# EAGLE board e-Bike System (EAGLE 7.7.0)
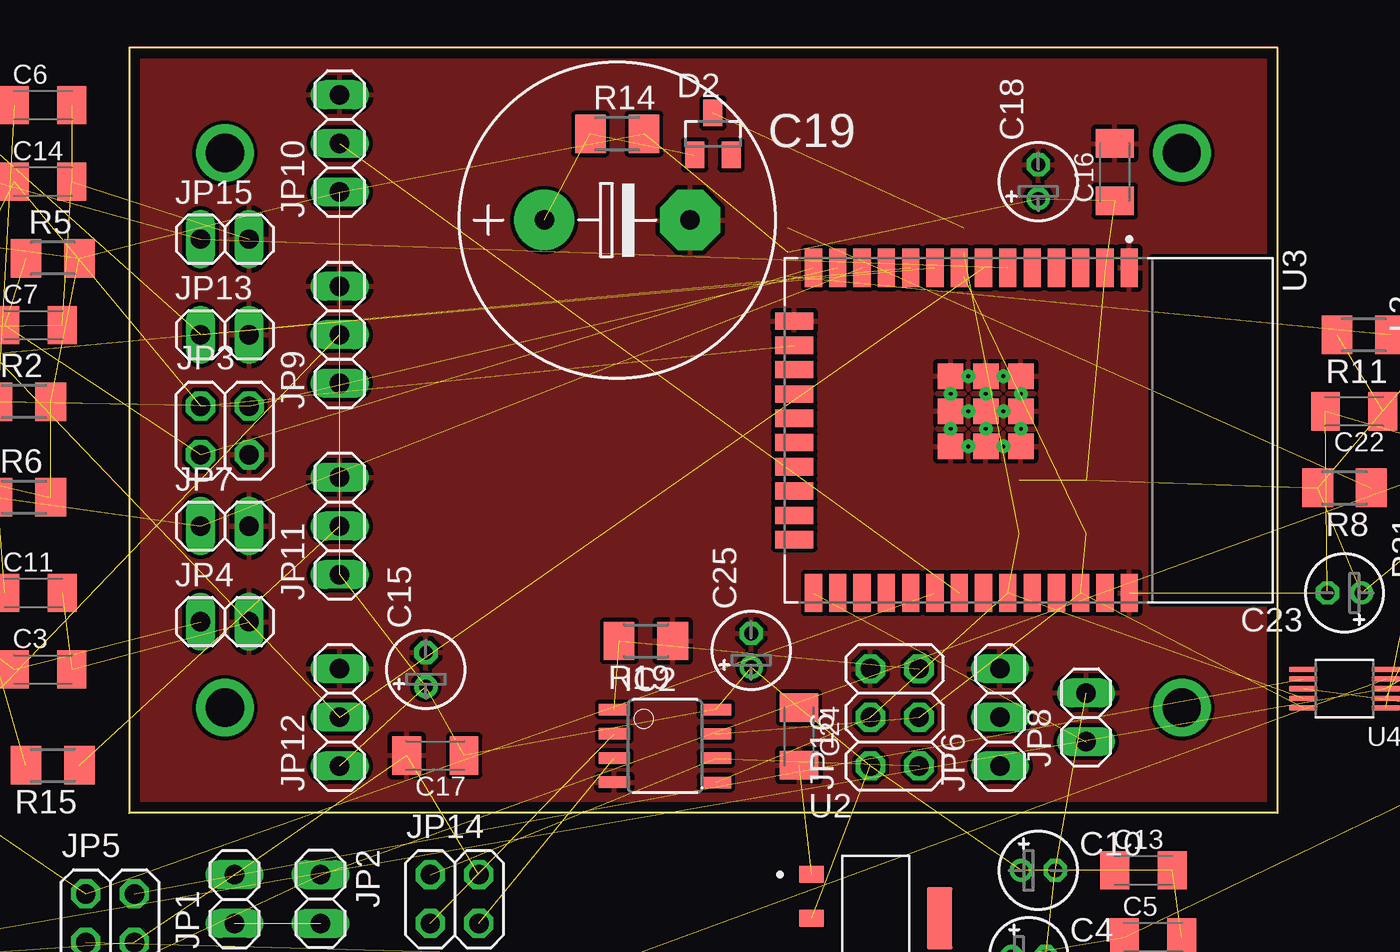
[diagram p0: board, top side]
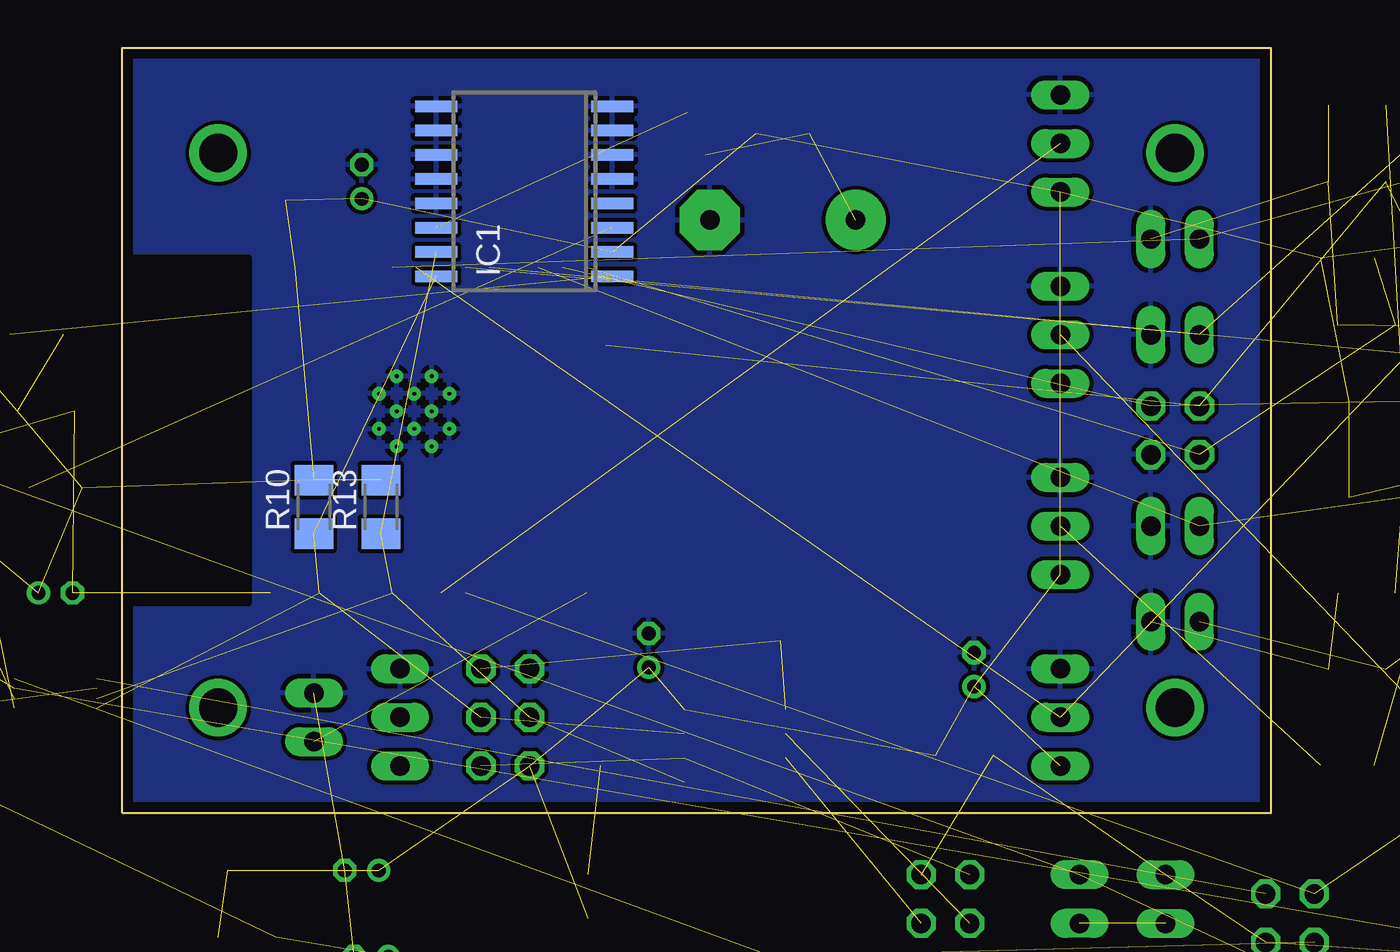
[diagram p1: board, bottom side, seen from below]

Size 60 x 40 mm. Coordinates in mm from the lower left corner, seen from the top.
Outline: 60,0 60,40 0,40 0,0 60,0
Copper layers (1*16): Top 0.035mm / dielectric 1.5mm / Bottom 0.035mm
Design rules "EagleRules": minimum track width 7mil, minimum drill 12mil, track to track 7mil, track to pad 7mil, pad to pad 7mil, via to via 7mil, smd to smd 0mil, copper to edge 20mil, drill to drill 10mil, minimum pad ring 10mil, minimum via ring 6mil, stop-mask expansion 2mil, vias tented up to drill 25mil, thermal gap 10mil

## Footprints (pad centres in the part's own frame; a part is rotated, then mirrored left to right if it is on the bottom)
E1,8-4 = drill 0.711 pad 1.168: + -0.889,0 | drill 0.711 pad 1.168 octagon: - 0.889,0
C1206K = smd 1.5 x 2: 1 -1.5,0; 2 1.5,0
E7,5-16 = drill 1.016 pad 3.15: + -3.81,0 | drill 1.016 pad 3.15 octagon: - 3.81,0
SMB = smd 2.4 x 2.4: A 2.2,0; C -2.2,0
SOT23 = smd 1 x 1.4: 1 -0.95,-1.1; 2 0.95,-1.1; 3 0,1.1
SO16W = smd 0.6 x 2.2: 1 -4.445,-4.6; 2 -3.175,-4.6; 3 -1.905,-4.6; 4 -0.635,-4.6; 5 0.635,-4.6; 6 1.905,-4.6; 7 3.175,-4.6; 8 4.445,-4.6; 9 4.445,4.6; 10 3.175,4.6; 11 1.905,4.6; 12 0.635,4.6; 13 -0.635,4.6; 14 -1.905,4.6; 15 -3.175,4.6; 16 -4.445,4.6
8S1 = smd 0.6 x 1.6: 1 -1.905,-2.654; 2 -0.645,-2.654; 3 0.625,-2.654; 4 1.895,-2.654; 5 1.905,2.654; 6 0.635,2.654; 7 -0.635,2.654; 8 -1.905,2.654
1X02 = drill 1.016 long: 1 -1.27,0; 2 1.27,0
2X02 = drill 1.016 octagon: 1 -1.27,-1.27; 2 -1.27,1.27; 3 1.27,-1.27; 4 1.27,1.27
1X03 = drill 1.016 long: 1 -2.54,0; 2 0,0; 3 2.54,0
2X03 = drill 1.016 octagon: 1 -2.54,-1.27; 2 -2.54,1.27; 3 0,-1.27; 4 0,1.27; 5 2.54,-1.27; 6 2.54,1.27
L5650M = smd 1.8 x 4: 1 -2.5,0; 2 2.5,0
L1812 = smd 1.9 x 3.4: 1 -1.95,0; 2 1.95,0
M1206 = smd 1.6 x 2: 1 -1.4,0; 2 1.4,0
TO-252-5L = smd 0.65 x 1.6: 1 -2.535,-4.465; 2 -1.265,-4.465; 3 0.005,-4.47; 4 1.275,-4.47; 5 2.545,-4.47 | smd 5.42 x 4.84: 6/GND 0,2.715
SOT229P700X180-4N = smd 1.31 x 0.93: 1 -3.345,2.29; 2 -3.345,0; 3 -3.345,-2.29 | smd 1.31 x 3.24: 4 3.345,0
MODULE_ESP32-WROOM-32 = smd 2 x 0.9: 1 -8.5,5.26; 2 -8.5,3.99; 3 -8.5,2.72; 4 -8.5,1.45; 5 -8.5,0.18; 6 -8.5,-1.09; 7 -8.5,-2.36; 8 -8.5,-3.63; 9 -8.5,-4.9; 10 -8.5,-6.17; 11 -8.5,-7.44; 12 -8.5,-8.71; 13 -8.5,-9.98; 14 -8.5,-11.25; 25 8.5,-11.25; 26 8.5,-9.98; 27 8.5,-8.71; 28 8.5,-7.44; 29 8.5,-6.17; 30 8.5,-4.9; 31 8.5,-3.63; 32 8.5,-2.36; 33 8.5,-1.09; 34 8.5,0.18; 35 8.5,1.45; 36 8.5,2.72; 37 8.5,3.99; 38 8.5,5.26 | smd 0.9 x 2: 15 -5.715,-12.25; 16 -4.445,-12.25; 17 -3.175,-12.25; 18 -1.905,-12.25; 19 -0.635,-12.25; 20 0.635,-12.25; 21 1.905,-12.25; 22 3.175,-12.25; 23 4.445,-12.25; 24 5.715,-12.25 | smd 1.33 x 1.33: 39_1 -2.835,-0.405; 39_2 -1,-0.405; 39_3 0.835,-0.405; 39_4 -2.835,-2.24; 39_5 -1,-2.24; 39_6 0.835,-2.24; 39_7 -2.835,-4.075; 39_8 -1,-4.075; 39_9 0.835,-4.075 | drill 0.2 pad 0.3: 39_10 -1.917,-0.405; 39_11 -0.083,-0.405; 39_12 -2.835,-1.323; 39_13 -1,-1.323; 39_14 0.835,-1.323; 39_15 -1.917,-2.24; 39_16 -0.083,-2.24; 39_17 -2.835,-3.158; 39_18 -1,-3.158; 39_19 0.835,-3.158; 39_20 -1.917,-4.075; 39_21 -0.083,-4.075
SOP50P490X110-10N = smd 1.47 x 0.28: 1 -2.15,1; 2 -2.15,0.5; 3 -2.15,0; 4 -2.15,-0.5; 5 -2.15,-1; 6 2.15,-1; 7 2.15,-0.5; 8 2.15,0; 9 2.15,0.5; 10 2.15,1

## Placement (x,y rotation side)
C1  [E1,8-4]  76,21.5 90 top  (outside the outline)
C2  100nF  [C1206K]  86,31 90 top  (outside the outline)
C3  100nF  [C1206K]  -4.5,7.5 0 top
C4  10uF  [E1,8-4]  47,-7.5 0 top  (outside the outline)
C5  100nF  [C1206K]  53.5,-6.5 0 top  (outside the outline)
C6  100nF  [C1206K]  -4.5,37 0 top
C7  100nF  [C1206K]  -5,25.5 0 top  (outside the outline)
C8  33nF  [C1206K]  76,6.5 90 top  (outside the outline)
C9  100nF  [C1206K]  85.5,22.5 90 top  (outside the outline)
C10  10uF  [E1,8-4]  47.5,-3 0 top
C11  100nF  [C1206K]  -5,11.5 0 top  (outside the outline)
C12  [E1,8-4]  81,21 90 top  (outside the outline)
C13  100nF  [C1206K]  53,-3 0 top
C14  100nF  [C1206K]  -4.5,33 0 top
C15  10uF  [E1,8-4]  15.5,7.5 90 top
C16  100nF  [C1206K]  51.5,33.5 90 top
C17  100nF  [C1206K]  16,3 180 top
C18  100uF  [E1,8-4]  47.5,33 90 top
C19  0.47F  [E7,5-16]  25.5,31 0 top
C20  22uF  [E1,8-4]  -11.5,24.5 90 top  (outside the outline)
C21  100nF  [C1206K]  69,7 90 top  (outside the outline)
C22  100nF  [C1206K]  64,21 180 top
C23  10uF  [E1,8-4]  63.5,11.5 180 top
C24  100nF  [C1206K]  35,4 270 top
C25  10uF  [E1,8-4]  32.5,8.5 90 top
D1  S310  [SMB]  81.5,30.5 90 top  (outside the outline)
D2  BAT54  [SOT23]  30.5,35.5 0 top
IC1  DS3231/SO  [SO16W]  39,32.5 90 bottom
IC2  ATtiny85  [8S1]  28,3.5 270 top
JP1  Zasilanie  [1X02]  5.5,-4.5 90 top  (outside the outline)
JP2  Stacyjka  [1X02]  10,-4.5 270 top  (outside the outline)
JP3  Przyciski  [2X02]  5,20 0 top
JP4  Czujnik prędkości  [1X02]  5,10 0 top
JP5  Tensometr  [2X02]  -1,-5.5 0 top  (outside the outline)
JP6  UART  [1X03]  45.5,5 90 top
JP7  Czujnik hamulca  [1X02]  5,15 0 top
JP8  Programowanie  [1X02]  50,5 90 top
JP9  PAS_wejście  [1X03]  11,25 90 top
JP10  PAS_wyjście  [1X03]  11,35 90 top
JP11  Wyjście manetki  [1X03]  11,15 90 top
JP12  Temperatura  [1X03]  11,5 90 top
JP13  Temp silnik  [1X02]  5,25 0 top
JP14  Oświetlenie  [2X02]  17,-4.5 0 top  (outside the outline)
JP15  Temp sterownik  [1X02]  5,30 0 top
JP16  ISP ATtiny  [2X03]  40,5 90 top
L1  [L5650M]  76,29.5 90 top  (outside the outline)
L2  [L1812]  69,27 90 top  (outside the outline)
L3  [L1812]  -23,-8.5 0 top  (outside the outline)
R1  10k  [M1206]  -12,13 0 top  (outside the outline)
R2  10k  [M1206]  -5.5,21.5 0 top  (outside the outline)
R3  2k2  [M1206]  84.5,8 90 top  (outside the outline)
R4  19k  [M1206]  80.5,7 90 top  (outside the outline)
R5  10k  [M1206]  -4,29 0 top
R6  10k  [M1206]  -5.5,16.5 0 top  (outside the outline)
R7  10k  [M1206]  -12,18 0 top  (outside the outline)
R8  10k  [M1206]  63.5,17 180 top
R9  100k  [M1206]  -11.5,3 180 top  (outside the outline)
R10  10k  [M1206]  50,16 90 bottom
R11  10k  [M1206]  64.5,25 180 top  (outside the outline)
R12  10k  [M1206]  -12,8.5 180 top  (outside the outline)
R13  10k  [M1206]  46.5,16 90 bottom
R14  10k  [M1206]  25.5,35.5 0 top
R15  1k  [M1206]  -4,2.5 180 top
R16  4k7  [M1206]  -11.5,30 0 top  (outside the outline)
R17  19k  [M1206]  -23,-18 0 top  (outside the outline)
R18  19k  [M1206]  -23,-25 0 top  (outside the outline)
R19  10k  [M1206]  27,9 180 top
R20  2k2  [M1206]  -10.5,39 0 top  (outside the outline)
R21  10k  [M1206]  68.5,13.5 90 top  (outside the outline)
R22  2k2  [M1206]  -11,34.5 0 top  (outside the outline)
R23  10k  [M1206]  69,20.5 90 top  (outside the outline)
U1  XL7015  [TO-252-5L]  79,14.5 90 top  (outside the outline)
U2  AMS1117-3.3  [SOT229P700X180-4N]  39,-5.5 0 top  (outside the outline)
U3  ESP32-WROOM-32  [MODULE_ESP32-WROOM-32]  47,20 270 top
U4  ADS1115  [SOP50P490X110-10N]  63.5,6.5 180 top

## Library data of the parts
C1-C25 L1-L3 R1-R23 = resistor
D1 D2 = diode
IC1 = DS3231; AVAILABILITY: Not in stock; CHECK_PRICES: https://www.snapeda.com/parts/DS3231/Analog+Devices/view-part/?ref=eda; DESCRIPTION: Real Time Clock (RTC) IC Clock/Calendar - I²C, 2-Wire Serial 8-SOIC (0.154, 3.90mm Width); MF: Analog Devices; MP: DS3231; PACKAGE: SOIC-16 Maxim Integrated; PRICE: None; SNAPEDA_LINK: https://www.snapeda.com/parts/DS3231/Analog+Devices/view-part/?ref=snap
IC2 = atmel; MPN: ATTINY13-20SSU; OC_FARNELL: 1455133; OC_NEWARK: 58M3771
JP1-JP16 = pinhead
U1 = XL7015; AVAILABILITY: In Stock; CHECK_PRICES: https://www.snapeda.com/parts/XL7015/XLSEMI/view-part/?ref=eda; DESCRIPTION: 0.8A 150KHz 80V Buck DC to DC; MF: XLSEMI; MP: XL7015; PACKAGE: Package; PRICE: None; SNAPEDA_LINK: https://www.snapeda.com/parts/XL7015/XLSEMI/view-part/?ref=snap
U2 = AMS1117-3.3; AVAILABILITY: Not in stock; CHECK_PRICES: https://www.snapeda.com/parts/AMS1117-3.3/Advanced+Monolithic+Systems/view-part/?ref=eda; DESCRIPTION: Sot223/Pkg 1-Amp 3.3-Volt Low Drop Out Voltage Regulatator; MF: Advanced Monolithic Systems; MP: AMS1117-3.3; PACKAGE: SOT-223 Seeed Technology; PRICE: None; SNAPEDA_LINK: https://www.snapeda.com/parts/AMS1117-3.3/Advanced+Monolithic+Systems/view-part/?ref=snap
U3 = ESP32-WROOM-32; AVAILABILITY: In Stock; CHECK_PRICES: https://www.snapeda.com/parts/ESP32-WROOM-32/Espressif+Systems/view-part/?ref=eda; DESCRIPTION: Bluetooth, WiFi 802.11b/g/n, Bluetooth v4.2 +EDR, Class 1, 2 and 3 Transceiver Module 2.4GHz ~ 2.5GHz Antenna Not Included, U.FL Surface Mount; MF: Espressif Systems; MP: ESP32-WROOM-32; PACKAGE: None; PRICE: None; SNAPEDA_LINK: https://www.snapeda.com/parts/ESP32-WROOM-32/Espressif+Systems/view-part/?ref=snap
U4 = ADS1115IDGST; AVAILABILITY: In Stock; CHECK_PRICES: https://www.snapeda.com/parts/ADS1115IDGST/Texas+Instruments/view-part/?ref=eda; DESCRIPTION: 16-bit, 860-SPS, 4-channel, delta-sigma ADC with PGA, oscillator, VREF, comparator and I2C; MF: Texas Instruments; MP: ADS1115IDGST; PACKAGE: VSSOP-10 Texas Instruments; PRICE: None; SNAPEDA_LINK: https://www.snapeda.com/parts/ADS1115IDGST/Texas+Instruments/view-part/?ref=snap

## Nets
20-80V: C1.+ C2.1 JP2.1 R17.2 U1.1
+12V: C4.+ C5.1 C8.1 C9.1 C12.+ JP5.1 L1.1 R4.2 U2.3
ADDR: R23.2 U4.1
ALERT: R21.1 U4.2
BATERIA_A: U4.5
BATERIA_V: R17.1 R18.2 U4.4
BOOT: JP8.1 U3.25
GND: C1.- C2.2 C3.2 C4.- C5.2 C6.2 C7.2 C9.2 C10.- C11.2 C12.- C13.2 C14.2 C15.- C16.2 C17.2 C18.- C19.- C20.- C22.2 C23.- C24.2 C25.- D1.A IC1.5 IC1.6 IC1.7 IC1.8 IC1.9 IC1.10 IC1.11 IC1.12 IC1.13 IC2.4 JP1.2 JP3.3 JP4.2 JP5.3 JP6.3 JP7.2 JP8.2 JP9.3 JP10.3 JP11.3 JP12.3 JP13.2 JP14.4 JP15.2 JP16.6 L3.1 R3.1 R18.1 R19.1 R23.1 U1.3 U1.5 U1.6/GND U2.1 U3.1 U3.15 U3.38 U3.39_1 U3.39_2 U3.39_3 U3.39_4 U3.39_5 U3.39_6 U3.39_7 U3.39_8 U3.39_9 U3.39_10 U3.39_11 U3.39_12 U3.39_13 U3.39_14 U3.39_15 U3.39_16 U3.39_17 U3.39_18 U3.39_19 U3.39_20 U3.39_21
HAMULEC: C11.1 JP7.1 R6.1 U3.12
MANETKA: U4.6
MANETKA_OUT: C20.+ R15.2 U3.10
N$1: JP11.2 R15.1
N$2: JP9.2 R9.1
N$5: IC1.1 R11.1
N$6: IC1.3 R8.1
N$7: C19.+ D2.1 R14.1
N$8: D2.3 IC1.14
N$9: JP1.1 JP2.2
N$18: C21.2 L3.2 U4.3
N$19: C8.2 R3.2 R4.1 U1.4
N$21: D1.C L1.2 U1.2
PAS: JP5.2 R9.2 R12.1 U3.30
PAS_OUT: JP10.2 U3.31
PREDKOSC: U3.11
PRĘDKOŚĆ: C3.1 JP4.1 R1.1
RST: IC2.1 JP16.5 R19.2
RX: JP6.2
RX_PROGRAMOWANIE: U3.34
RX_STEROWNIK: U3.27
SCL: IC1.16 IC2.7 JP16.3 R10.1 U3.36 U4.10
SDA: IC1.15 IC2.5 JP16.4 R13.1 U3.33 U4.9
STEROWNIK_ON/OFF: U3.37
SW_DOWN: C6.1 JP3.4 R2.1 U3.13
SW_SET: C7.1 JP3.1 R5.1 U3.14
SW_UP: C14.1 JP3.2 R7.1 U3.16
TEMP_SILNIK: JP13.1 R20.1 U3.9
TEMP_STEROWNIK: JP15.1 R22.1 U3.6
TEMPERATURA: JP12.2 R16.1 U3.7
TENSOMETR: JP5.4 U4.7
TX: JP6.1
TX_PROGRAMOWANIE: U3.35
TX_STEROWNIK: U3.28
USB: U3.8
VCC: C10.+ C13.1 C15.+ C16.1 C17.1 C18.+ C22.1 C23.+ C24.1 C25.+ IC1.2 IC2.8 JP9.1 JP10.1 JP11.1 JP12.1 JP16.2 L2.1 R1.2 R2.2 R5.2 R6.2 R7.2 R8.2 R10.2 R11.2 R12.2 R13.2 R14.2 R16.2 R20.2 R21.2 R22.2 U2.2 U3.2
VDD: C21.1 L2.2 U4.8
ŚWIATŁO_DZIEŃ: IC2.2 JP14.1
ŚWIATŁO_PRZÓD: IC2.3 JP14.3
ŚWIATŁO_TYŁ: IC2.6 JP14.2 JP16.1

## Tracks (layer width: path | path; a pad name or v marks a point on that pad's centre or on a via)
20-80V  (4 unrouted)
+12V  (8 unrouted)
ADDR  (1 unrouted)
ALERT  (1 unrouted)
BATERIA_V  (2 unrouted)
BOOT  (1 unrouted)
GND  (28 unrouted)
  pour Top (isolate 0.203, rank 2): 0,40 60,40 60,0 0,0
  pour Bottom (isolate 0.203): 0,40 60,40 60,0 0,0
HAMULEC  (3 unrouted)
MANETKA_OUT  (2 unrouted)
N$1  (1 unrouted)
N$2  (1 unrouted)
N$4
  cutout Top (isolate 0.254): 53.5,29 60,29 60,11 53.5,11
  cutout Bottom (isolate 0.254): 53.5,29 60,29 60,11 53.5,11
N$5  (1 unrouted)
N$6  (1 unrouted)
N$7  (2 unrouted)
N$8  (1 unrouted)
N$9  (1 unrouted)
N$11  (via drill 2)
  other vias: 5,34.5
N$12  (via drill 2)
  other vias: 5,5.5
N$13  (via drill 2)
  other vias: 55,34.5
N$14  (via drill 2)
  other vias: 55,5.5
N$18  (2 unrouted)
N$19  (3 unrouted)
N$21  (2 unrouted)
PAS  (3 unrouted)
PAS_OUT  (1 unrouted)
PRĘDKOŚĆ  (2 unrouted)
RST  (2 unrouted)
SCL  (5 unrouted)
SDA  (5 unrouted)
SW_DOWN  (3 unrouted)
SW_SET  (3 unrouted)
SW_UP  (3 unrouted)
TEMP_SILNIK  (2 unrouted)
TEMP_STEROWNIK  (2 unrouted)
TEMPERATURA  (2 unrouted)
TENSOMETR  (1 unrouted)
VCC  (34 unrouted)
VDD  (2 unrouted)
ŚWIATŁO_DZIEŃ  (1 unrouted)
ŚWIATŁO_PRZÓD  (1 unrouted)
ŚWIATŁO_TYŁ  (2 unrouted)